# Altium PCB ext.PcbDoc
Units mil, origin at the board's own origin, x right, y up, seen from the top; angles counter-clockwise.
Board outline 996.06 x 586.61 mil, 2 copper layers (Top Layer, Bottom Layer); 7 components, 13 nets, 47 pads, 3 vias.
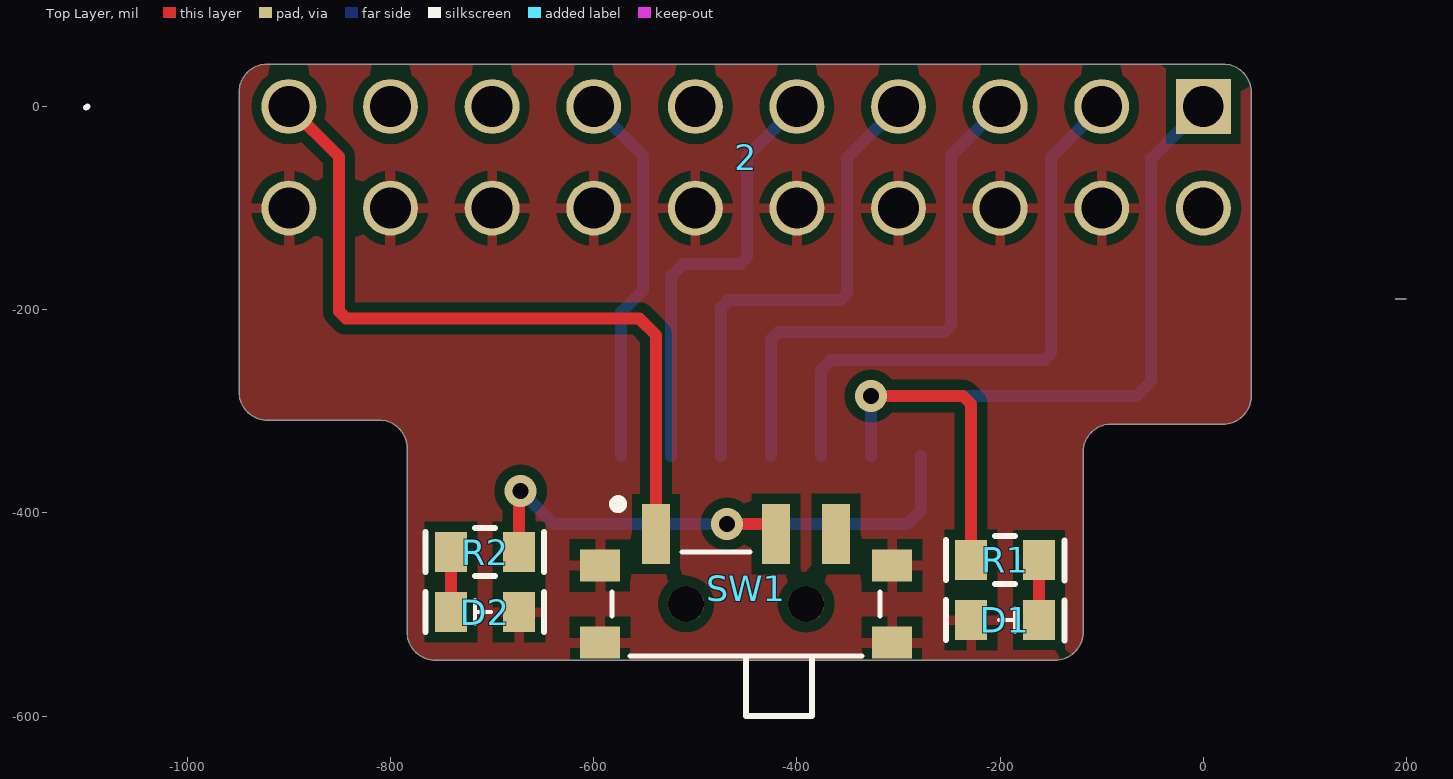
[diagram p0: Top Layer view]
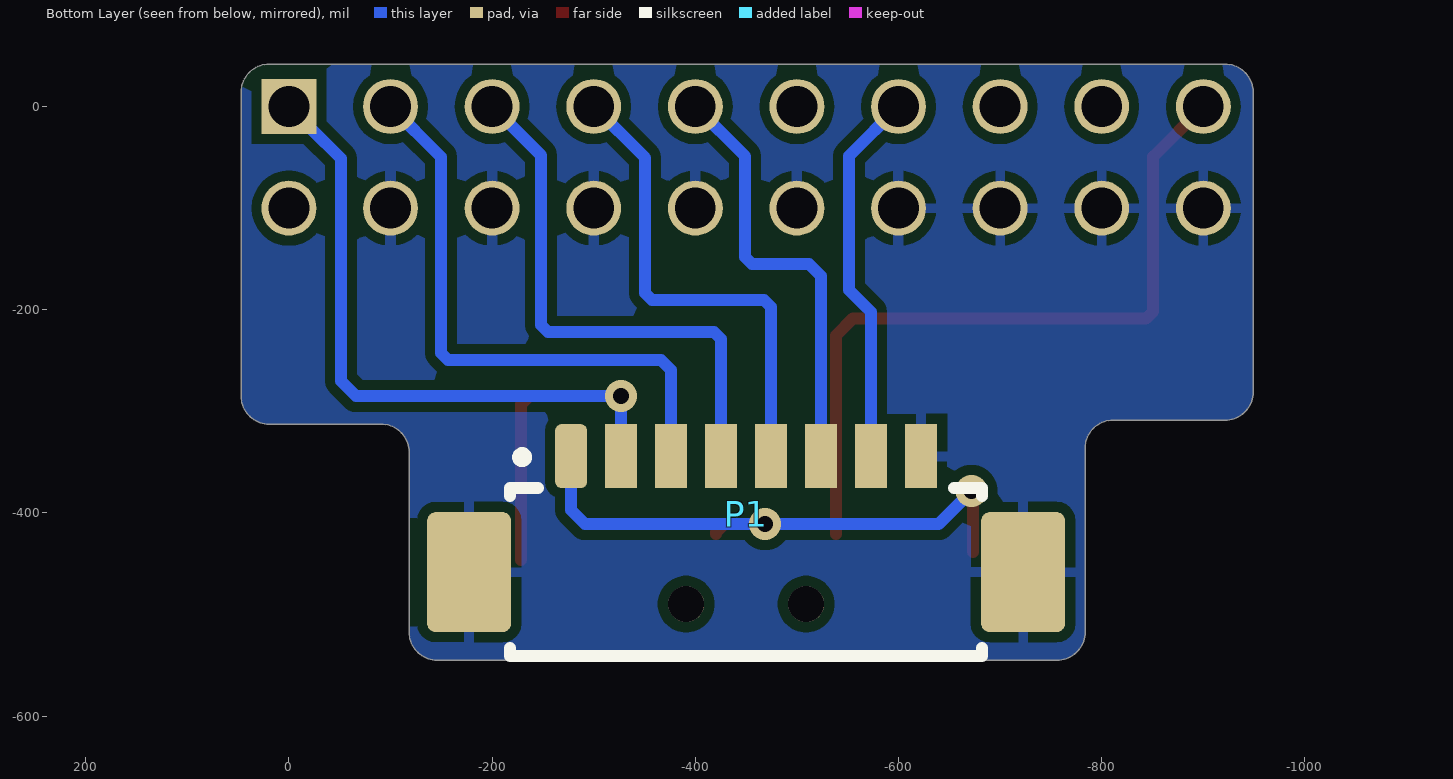
[diagram p1: Bottom Layer view, seen from below]
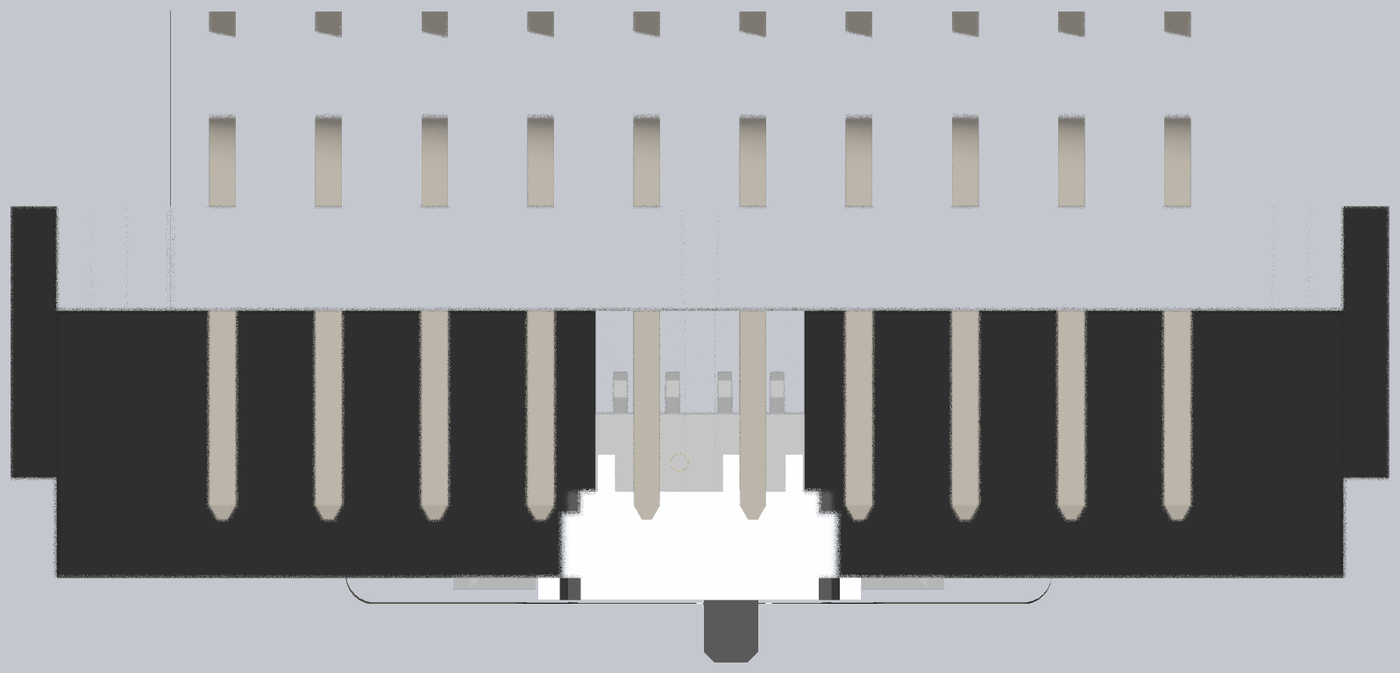
[diagram p2: 3D render of the assembled board from above, using the file's embedded part models]

## Layer stack, top to bottom
Top Solder: solder mask 0.4, Solder Resist, Dk 3.5
Top Layer: signal copper 1.4
Dielectric 1: dielectric 12.6, FR-4, Dk 4.8
Bottom Layer: signal copper 1.4
Bottom Solder: solder mask 0.4, Solder Resist, Dk 3.5

## Board outline
-811.22,-308.66 cw(c-811.22,-336.22) -783.66,-336.22 -783.66,-517.32 ccw(c-756.1,-517.32) -756.1,-544.88 -145.87,-544.88 ccw(c-145.87,-517.32) -118.31,-517.32 -118.31,-340.16 cw(c-90.75,-340.16) -90.75,-312.6 19.49,-312.6 ccw(c19.49,-285.04) 47.05,-285.04 47.05,-285.11 47.05,14.17 ccw(c19.49,14.17) 19.49,41.73 -921.46,41.73 ccw(c-921.46,14.17) -949.02,14.17 -949.02,-281.1 ccw(c-921.46,-281.1) -921.46,-308.66

## Design rules (kind name [scope] priority, off if disabled: settings)
Clearance [All] p1: gap=10 ignorepadtopadclearanceinfootprint=FALSE
ComponentClearance SW [HasFootprint('PCBComponent_1')] p1: gap=-39.37 collisioncheckmode=3 verticalgap=-39.37 showdistances=FALSE
ComponentClearance JTAG_con [HasFootprint('DS1013-20R')] p2: gap=-1 collisioncheckmode=3 verticalgap=-1 showdistances=FALSE
ComponentClearance [All] p3: gap=10 collisioncheckmode=3 verticalgap=10 showdistances=FALSE
PolygonConnect [All] p1: connectstyle=Relief reliefconductorwidth=10 reliefentries=4 polygonreliefangle="90 Angle" airgapwidth=10
RoutingVias [All] p1: holewidth=28 width=50 viastyle="Through Hole" minholewidth=28 minwidth=50 maxholewidth=28 maxwidth=50
SolderMaskExpansion [All] p1: expansion=4 istentingtop=FALSE
Width [All] p1: maxlimit=31.5 minlimit=7.87 preferedwidth=11.81
29 further rules are at their usual default settings.

## Components (designator, comment, footprint, x,y, rotation, side; value= is the part's Value field where it differs from the comment)
2 "Header 2X20" DS1013-20R 0,0 r270 top locked (schematic designator X1)
D1 "LED" LED_0603 -161.61,-505.51 r180 top value=red
D2 "LED" LED_0603 -740.35,-497.64 r0 top value=blue
P1 "PicoBlade_53261-0871" 53261-0871 -450,-400.2 r180 bottom locked
R1 "OSM R1-8" SMD_0603 -161.61,-446.46 r180 top value=1k
R2 "OSM R1-8" SMD_0603 -740.35,-438.58 r0 top value=1k
SW1 "MK-12C02" PCBComponent_1 -450,-489.76 r0 top locked

## Footprints (in the part's own frame and the unit in brackets; to place one, negate y for a bottom-side part, rotate by r counter-clockwise, add the part's x,y. Pads: shape width x height; smd on the part's side, far side on the other; paste and mask are expansions set on the pad)
53261-0871 [mm]
  rrect40% 0.8x1.6 smd: 1(-4.375,1.425)
  rect 0.8x1.6 smd: 2(-3.125,1.425) 3(-1.875,1.425) 4(-0.625,1.425) 5(0.625,1.425) 6(1.875,1.425) 7(3.125,1.425) 8(4.375,1.425)
  rrect20% 2.1x3 smd: MP1(-6.925,-1.475) MP2(6.925,-1.475)
  silkscreen extent -5.9,-3.57 5.9,1.52, body extent -7.55,-3.31 7.6,1.89, height 3.4
DS1013-20R [mil] "header  20 pin right angle 2.54 pitch"
  rect 54.02x54 hole 40.16: 1(0,0)
  oval 54.02x54 hole 40.16: 2(100,0) 3(0,-100) 4(100,-100) 5(0,-200) 6(100,-200) 7(0,-300) 8(100,-300) 9(0,-400) 10(100,-400) 11(0,-500) 12(100,-500) 13(0,-600) 14(100,-600) 15(0,-700) 16(100,-700) 17(0,-800) 18(100,-800) 19(0,-900) 20(100,-900)
  silkscreen extent 0,-1100 189,200, body extent -14,-1099 520,200, height 339
LED_0603 [mm]
  rect 0.8x1 smd: 1(0,0) 2(1.7,0)
  silkscreen extent -0.64,-0.5 2.32,0.51, body extent 0.04,-0.37 1.69,0.36, height 0.68
PCBComponent_1 [mm]
  rect 0.7x1.5 smd: 1(-2.25,1.75) 2(0.75,1.75) 3(2.25,1.75)
  rect 1x0.8 smd: S1(-3.65,0.965) S2(-3.65,-0.965) S3(3.65,-0.965) S4(3.65,0.965)
  round 0.9 hole 0.9 unplated: ""(-1.5,0) ""(1.5,0)
  silkscreen extent -3.35,-2.79 3.35,2.6, body extent -3.86,-2.79 3.86,2.18, height 1.4
SMD_0603 [mm]
  rect 0.8x1 smd: 1(0,0) 2(1.7,0)
  silkscreen extent -0.64,-0.6 2.32,0.6, body extent 0.04,-0.42 1.68,0.43, height 0.43

## Part data
2: "Header, 20-Pin, Dual row", Назначение="Header, 20-Pin, Dual row", Наименование=PLD2-20, Потребление, Вт=0,0
P1: "Male Header, Pitch 1.25 mm, 1 x 8 Position, Height 3.4 mm, -40 to 85 degC, RoHS, Tape and Reel", ComponentLink1Description=DataSheet, ComponentLink1URL=http://www.molex.com/pdm_docs/sd/532610671_sd.pdf, Назначение="Male Header, Pitch 1.25 mm, 1 x 8 Position, Height 3.4 mm, -40 to 85 degC, RoHS, Tape and Reel", Наименование=53261-0871, Потребление, Вт=0.0
R1 R2: library part Resistor, "Resistor", Назначение=SMD-резистор, Наименование="ОСМ Р1-12", Потребление, Вт=0,001, Точность=%
SW1: "Surface Mount, Right Angle 1A SPDT 6V Black 10,000 Cycles SMD,6.6x1.4mm Slide Switches"
D1 D2: Назначение=Светодиод, Наименование=SMD-LED, Потребление, Вт=0,01

## Via types
v1: diameter 31.5, hole 15.75, Top Layer to Bottom Layer, tented both sides, 3 vias

## Nets (pads, with @x,y where several pads share a name; then routed paths per layer and width w, separated by ;. In a path a pad name is that pad's centre, name@x,y a point inside that pad or via, vN(x,y) a via of type N, cw(c..) or ccw(c..) an arc to the next point about the centre after c; other vN are vias at no path point)
5V: 2.19 SW1.1 | length 739.6
  Top Layer w11.81: 2.19 -850.59,-49.41 -850.59,-201.74 -843.67,-208.66 -555.12,-208.66 -538.58,-225.2 SW1.1
GND: 2.4 2.6 2.8 2.10 2.12 2.14 2.16 2.18 2.20 D1.2 D2.2 P1.8 P1.MP1 P1.MP2 SW1.S1 SW1.S2 SW1.S3 SW1.S4
NetD1_1: D1.1 R1.1 | length 59.1
  Top Layer w11.81: D1.1 R1.1
NetD2_1: D2.1 R2.1 | length 51.2
  Top Layer w11.81: D2.1 R2.1@-740.35,-446.46
RESET: 2.15
RTCK: 2.11
TCK/SWC: 2.9 P1.6 | length 428.2
  Bottom Layer w11.81: P1.6 -523.82,-166.93 -512.01,-155.12 -455.93,-155.12 -449.02,-148.2 -449.02,-49.02 2.9
TDI: 2.5 P1.4 | length 533.1
  Bottom Layer w11.81: P1.4 -425.39,-228.97 -418.47,-222.05 -255.15,-222.05 -248.23,-215.13 -248.23,-48.23 2.5
TDO/SWO: 2.13 P1.7 | length 376
  Bottom Layer w11.81: 2.13@-597.18,0 2.13 -551.38,-48.62 -551.38,-180.71 -573.03,-202.36 P1.7
TMS/SWD: 2.7 P1.5 | length 481
  Bottom Layer w11.81: P1.5 -474.61,-197.47 -467.69,-190.55 -357.51,-190.55 -350.59,-183.63 -350.59,-50.59 2.7
TRST: 2.3 P1.3 | length 581.3
  Bottom Layer w11.81: P1.3 -376.18,-259.45 -366.34,-249.61 -156.72,-249.61 -149.8,-242.69 -149.8,-49.81 2.3
VRef: 2.1 P1.2 R1.2 | length 887.5
  Top Layer w11.81: v1(-326.97,-285.04) -236.42,-285.04 -228.54,-292.91 R1.2
  Bottom Layer w11.81: P1.2 v1(-326.97,-285.04) -66.17,-285.04 -51.38,-270.25 -51.38,-51.38 2.1@-21.1,-21.1 ; 2.1@-21.09,-21.1 2.1
VTarget: P1.1 R2.2 SW1.2 | length 580.8
  Top Layer w11.81: R2.2 -673.43,-379.94 v1(-671.9,-378.41) ; v1(-468.7,-411.02) -428.35,-411.02 -420.47,-418.9 SW1.2
  Bottom Layer w11.81: v1(-671.9,-378.41) -639.29,-411.02 -291.54,-411.02 -277.76,-397.24 P1.1
pads on no net: 2.2 2.17 SW1. SW1.3

## Polygon pours and split planes (outlines as drawn)
GND on Top Layer "GND_L01_P005" (solid, pour order 5): -811.22,-308.66 cw(c-811.22,-336.22) -783.66,-336.22 -783.66,-517.32 ccw(c-756.1,-517.32) -756.1,-544.88 -145.87,-544.88 ccw(c-145.87,-517.32) -118.31,-517.32 -118.31,-340.16 cw(c-90.75,-340.16) -90.75,-312.6 19.49,-312.6 ccw(c19.49,-285.04) 47.05,-285.04 47.05,-285.11 47.05,14.17 ccw(c19.49,14.17) 19.49,41.73 -921.46,41.73 ccw(c-921.46,14.17) -949.02,14.17 -949.02,-281.1 ccw(c-921.46,-281.1) -921.46,-308.66
GND on Bottom Layer "GND_L02_P003" (solid, pour order 3): -811.22,-308.66 cw(c-811.22,-336.22) -783.66,-336.22 -783.66,-517.32 ccw(c-756.1,-517.32) -756.1,-544.88 -145.87,-544.88 ccw(c-145.87,-517.32) -118.31,-517.32 -118.31,-340.16 cw(c-90.75,-340.16) -90.75,-312.6 19.49,-312.6 ccw(c19.49,-285.04) 47.05,-285.04 47.05,-285.11 47.05,14.17 ccw(c19.49,14.17) 19.49,41.73 -921.46,41.73 ccw(c-921.46,14.17) -949.02,14.17 -949.02,-281.1 ccw(c-921.46,-281.1) -921.46,-308.66

## Silkscreen, mask and mechanical layers (free items; w line width, h text height)
Board Shape:
  lines w5.91: 47.24,-283.54 47.24,15.75 ccw(c19.69,15.75) 19.69,43.31 -921.26,43.31 ccw(c-921.26,15.75) -948.82,15.75 -948.82,-279.53 ccw(c-921.26,-279.53) -921.26,-307.09 -811.02,-307.09 cw(c-811.02,-334.65) -783.46,-334.65 -783.46,-515.75 ccw(c-755.91,-515.75) -755.91,-543.31 -145.67,-543.31 ccw(c-145.67,-515.75) -118.11,-515.75 -118.11,-338.58 cw(c-90.55,-338.58) -90.55,-311.02 19.69,-311.02 ccw(c19.69,-283.46) 47.24,-283.46